# EAGLE board Buttons (EAGLE 5.11)
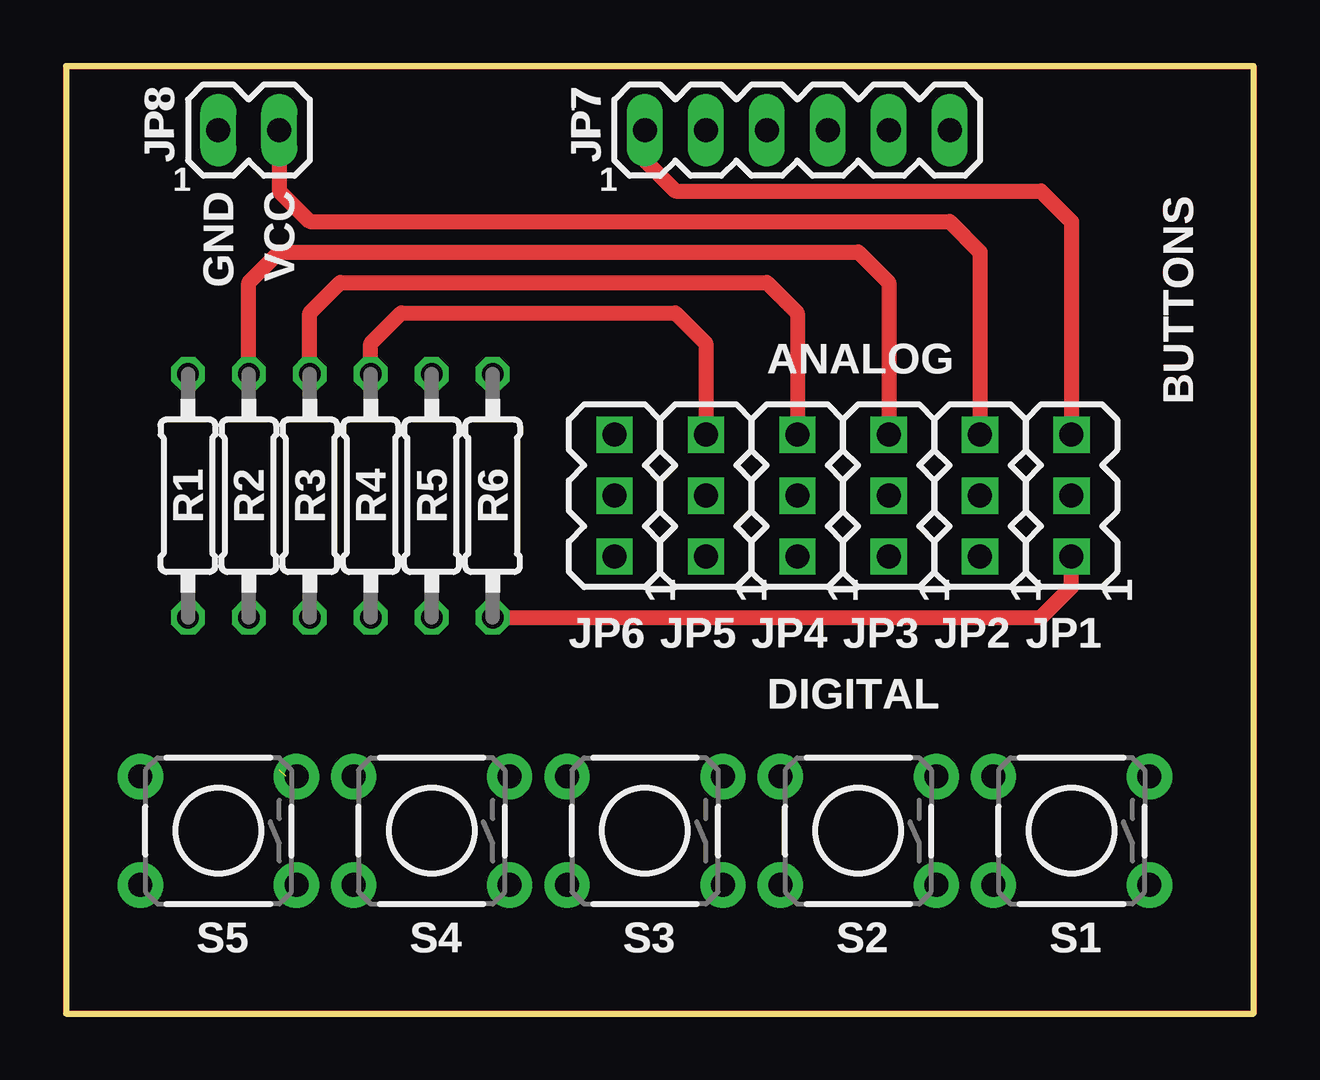
[diagram p0: board, top side]
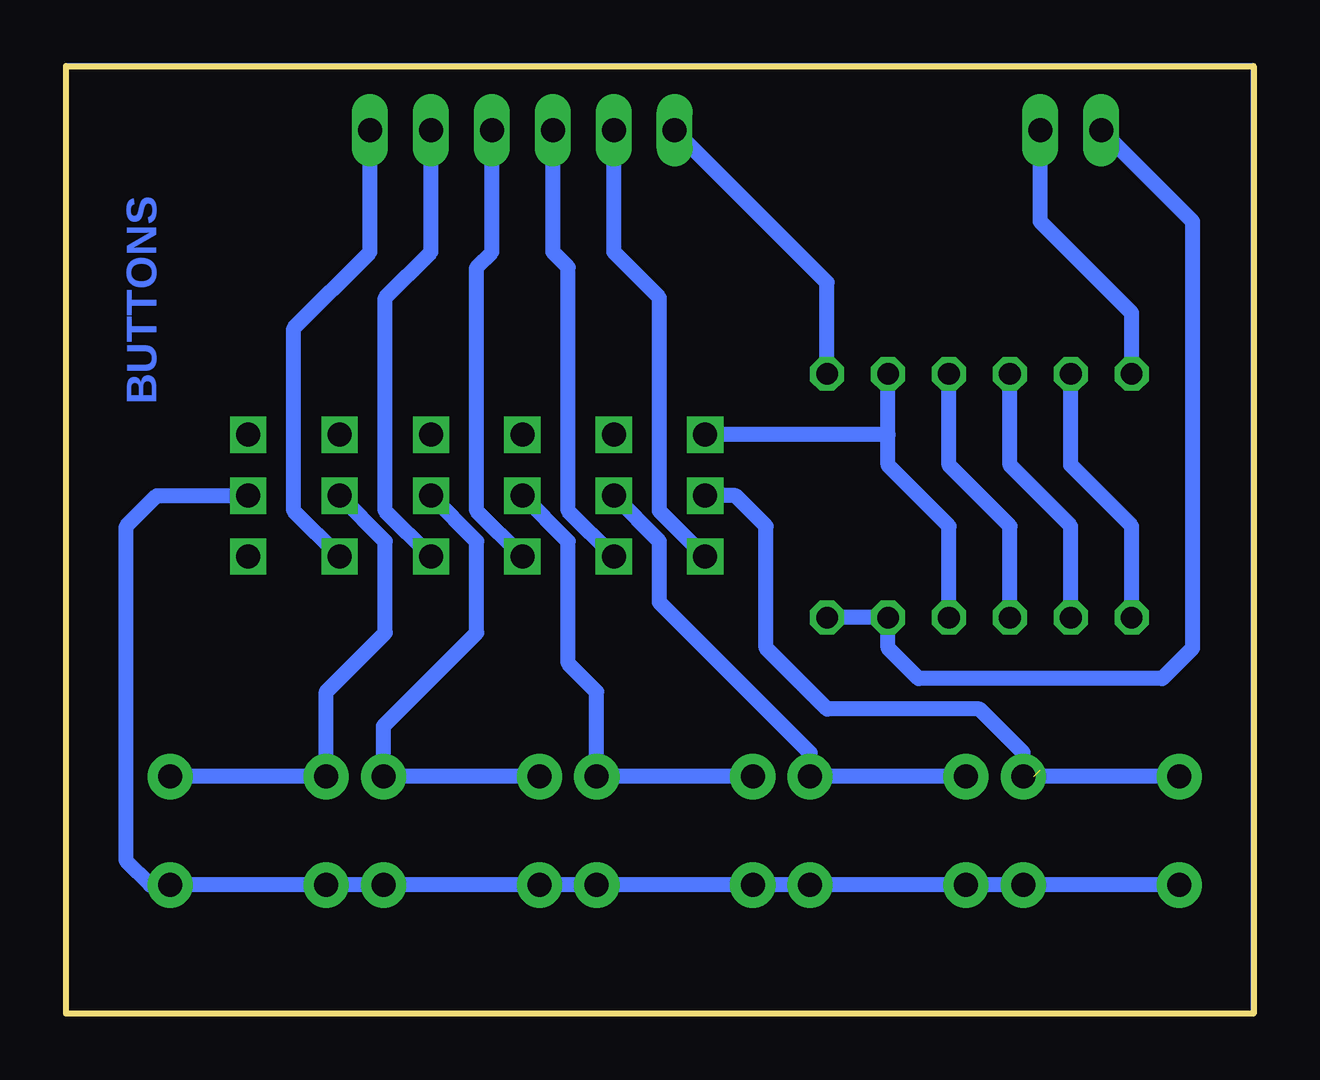
[diagram p1: board, bottom side, seen from below]

Size 49.5 x 39.5 mm. Coordinates in mm from the lower left corner, seen from the top.
Outline: 0,0 49.5,0 49.5,39.5 0,39.5 0,0
Copper layers (1*16): Top 0.035mm / dielectric 1.5mm / Bottom 0.035mm
Design rules "10mils_drill35": minimum track width 10mil, minimum drill 35mil, track to track 10mil, track to pad 10mil, pad to pad 10mil, via to via 10mil, smd to smd 10mil, copper to edge 40mil, drill to drill 10mil, minimum pad ring 10mil, minimum via ring 8mil, stop-mask expansion 0mil, vias tented up to drill 0mil, thermal gap 10mil
Net classes: 0 default: width 0.635 mm, drill 0.9 mm, clearance 0.254 mm; 1 GND: width 0.635 mm, drill 0.9 mm, clearance 0.254 mm to class 0, clearance 0.254 mm; 2 Border: width 0.254 mm, drill 0.9 mm, clearance 0.254 mm to class 0, clearance 0.254 mm to class 1, clearance 0.254 mm; 3 VCC: width 0.635 mm, drill 0.9 mm, clearance 0.254 mm to class 0, clearance 0.254 mm to class 1, clearance 0.254 mm to class 2, clearance 0.254 mm

## Footprints (pad centres in the part's own frame; a part is rotated, then mirrored left to right if it is on the bottom)
JP2SQ = drill 1 square: 1 -2.54,0; 2 0,0; 3 2.54,0
1X06 = drill 1 long: 1 0,0; 2 2.54,0; 3 5.08,0; 4 7.62,0; 5 10.16,0; 6 12.7,0
1X02 = drill 1 long: 1 0,0; 2 2.54,0
0207/10 = drill 0.9 octagon: 1 -5.08,0; 2 5.08,0
TACTILE-PTH = drill 1 pad 1.88 round: 1 -3.251,2.261; 2 3.251,2.261; 3 -3.251,-2.261; 4 3.251,-2.261

## Placement (x,y rotation side)
JP1  [JP2SQ]  41.91,21.59 90 top
JP2  [JP2SQ]  38.1,21.59 90 top
JP3  [JP2SQ]  34.29,21.59 90 top
JP4  [JP2SQ]  30.48,21.59 90 top
JP5  [JP2SQ]  26.67,21.59 90 top
JP6  [JP2SQ]  22.86,21.59 90 top
JP7  [1X06]  24.13,36.83 0 top
JP8  [1X02]  6.35,36.83 0 top
R1  [0207/10]  5.08,21.59 90 top
R2  [0207/10]  7.62,21.59 90 top
R3  [0207/10]  10.16,21.59 90 top
R4  [0207/10]  12.7,21.59 90 top
R5  [0207/10]  15.24,21.59 90 top
R6  [0207/10]  17.78,21.59 90 top
S1  [TACTILE-PTH]  41.91,7.62 180 top
S2  [TACTILE-PTH]  33.02,7.62 180 top
S3  [TACTILE-PTH]  24.13,7.62 180 top
S4  [TACTILE-PTH]  15.24,7.62 180 top
S5  [TACTILE-PTH]  6.35,7.62 180 top

## Library data of the parts
JP1-JP8 R1-R6 S1-S5 = MyLibrary

## Nets
GND [GND]: JP1.1 JP8.1 R5.1 R6.1
N$1: JP5.3 R3.1 R4.2
N$2: JP6.3 R4.1 R5.2
N$4: JP4.3 R2.1 R3.2
N$5: JP1.2 S1.1 S1.2 S2.1 S2.2 S3.1 S3.2 S4.1 S4.2 S5.1 S5.2
N$7: JP1.3 JP7.1 R6.2
N$8: JP6.2 S5.3 S5.4
N$9: JP2.2 S1.3 S1.4
N$10: JP3.3 R1.1 R2.2
N$11: JP2.1 JP7.6
N$12: JP3.2 S2.3 S2.4
N$13: JP3.1 JP7.5
N$14: JP5.2 S4.3 S4.4
N$15: JP4.2 S3.3 S3.4
N$16: JP4.1 JP7.4
N$18: JP5.1 JP7.3
N$20: JP6.1 JP7.2
VCC [VCC]: JP2.3 JP8.2 R1.2

## Tracks (layer width: path | path; a pad name or v marks a point on that pad's centre or on a via)
GND
  Top 0.635: R6.1 40.64,16.51 41.91,17.78 JP1.1
  Bottom 0.635: R6.1 R5.1 15.24,15.24 13.97,13.97 3.81,13.97 2.54,15.24 2.54,33.02 JP8.1
N$1
  Top 0.635: JP5.3 26.67,27.94 25.4,29.21 13.97,29.21 12.7,27.94 R4.2
  Bottom 0.635: R3.1 10.16,20.32 12.7,22.86 R4.2
N$2
  Bottom 0.635: R4.1 12.7,20.32 15.24,22.86 15.24,24.13 | 15.24,24.13 R5.2 | 15.24,24.13 JP6.3
N$3
  Top 0.254: 0,0 0,39.5 49.5,39.5 49.5,0 0,0
N$4
  Top 0.635: JP4.3 30.48,29.21 29.21,30.48 11.43,30.48 10.16,29.21 R3.2
  Bottom 0.635: R2.1 7.62,20.32 10.16,22.86 R3.2
N$5
  Bottom 0.635: S5.2 S5.1 S4.2 S4.1 S3.2 S3.1 S2.2 S2.1 S1.2 S1.1 46,5.36 46.99,6.35 46.99,20.32 45.72,21.59 JP1.2
N$6
  Bottom 0.254: 0,39.5 49.5,39.5 49.5,0 0,0 0,39.5
N$7
  Top 0.635: JP1.3 41.91,33.02 40.64,34.29 25.4,34.29 24.13,35.56 JP7.1
  Bottom 0.635: R6.2 17.78,30.48 JP7.1
N$8  (1 unrouted)
  Bottom 0.635: S5.4 S5.3 | S5.3 9.17,9.88 | S5.3 9.6,10.87 11.43,12.7 17.78,12.7 20.32,15.24 20.32,20.32 21.59,21.59 JP6.2
N$9
  Bottom 0.635: S1.3 S1.4 38.66,13.41 36.2,15.88 36.2,19.68 JP2.2
N$10
  Top 0.635: JP3.3 34.29,30.48 33.02,31.75 8.89,31.75 7.62,30.48 R2.2
  Bottom 0.635: R1.1 5.08,20.32 7.62,22.86 R2.2
N$11
  Bottom 0.635: JP2.1 40.01,20.95 40.01,28.57 36.83,31.75 JP7.6
N$12
  Bottom 0.635: S2.4 S2.3 36.27,11.99 32.38,15.88 32.38,19.68 JP3.2
N$13
  Bottom 0.635: JP3.1 36.2,20.95 36.2,29.84 34.29,31.75 JP7.5
N$14
  Bottom 0.635: S4.4 S4.3 18.49,10.87 24.77,17.14 24.77,19.68 JP5.2
N$15
  Bottom 0.635: S3.4 S3.3 27.38,13.41 28.57,14.61 28.57,19.68 JP4.2
N$16
  Bottom 0.635: JP4.1 32.38,20.95 32.38,31.11 31.75,31.75 JP7.4
N$18
  Bottom 0.635: JP5.1 28.57,20.95 28.57,31.11 29.21,31.75 JP7.3
N$20
  Bottom 0.635: JP6.1 24.77,20.95 24.77,29.84 26.67,31.75 JP7.2
VCC
  Top 0.635: JP2.3 38.1,31.75 36.83,33.02 10.16,33.02 8.89,34.29 JP8.2
  Bottom 0.635: R1.2 5.08,29.21 8.89,33.02 JP8.2

## Text on the board
Top: BUTTONS
Bottom: BUTTONS
tNames: GND | VCC | ANALOG | BUTTONS | DIGITAL
_tsilk: JP8 | JP7 | 1 | GND | VCC | 1 | ANALOG | BUTTONS | R1 | R2 | R3 | R4 | R5 | R6 | JP6 | 1 | JP5 | 1 | JP4 | 1 | JP3 | 1 | JP2 | 1 | JP1 | 1 | DIGITAL | S5 | S4 | S3 | S2 | S1
Contour: BUTTONS